# EAGLE board TemperatureReader (EAGLE 7.3.0)
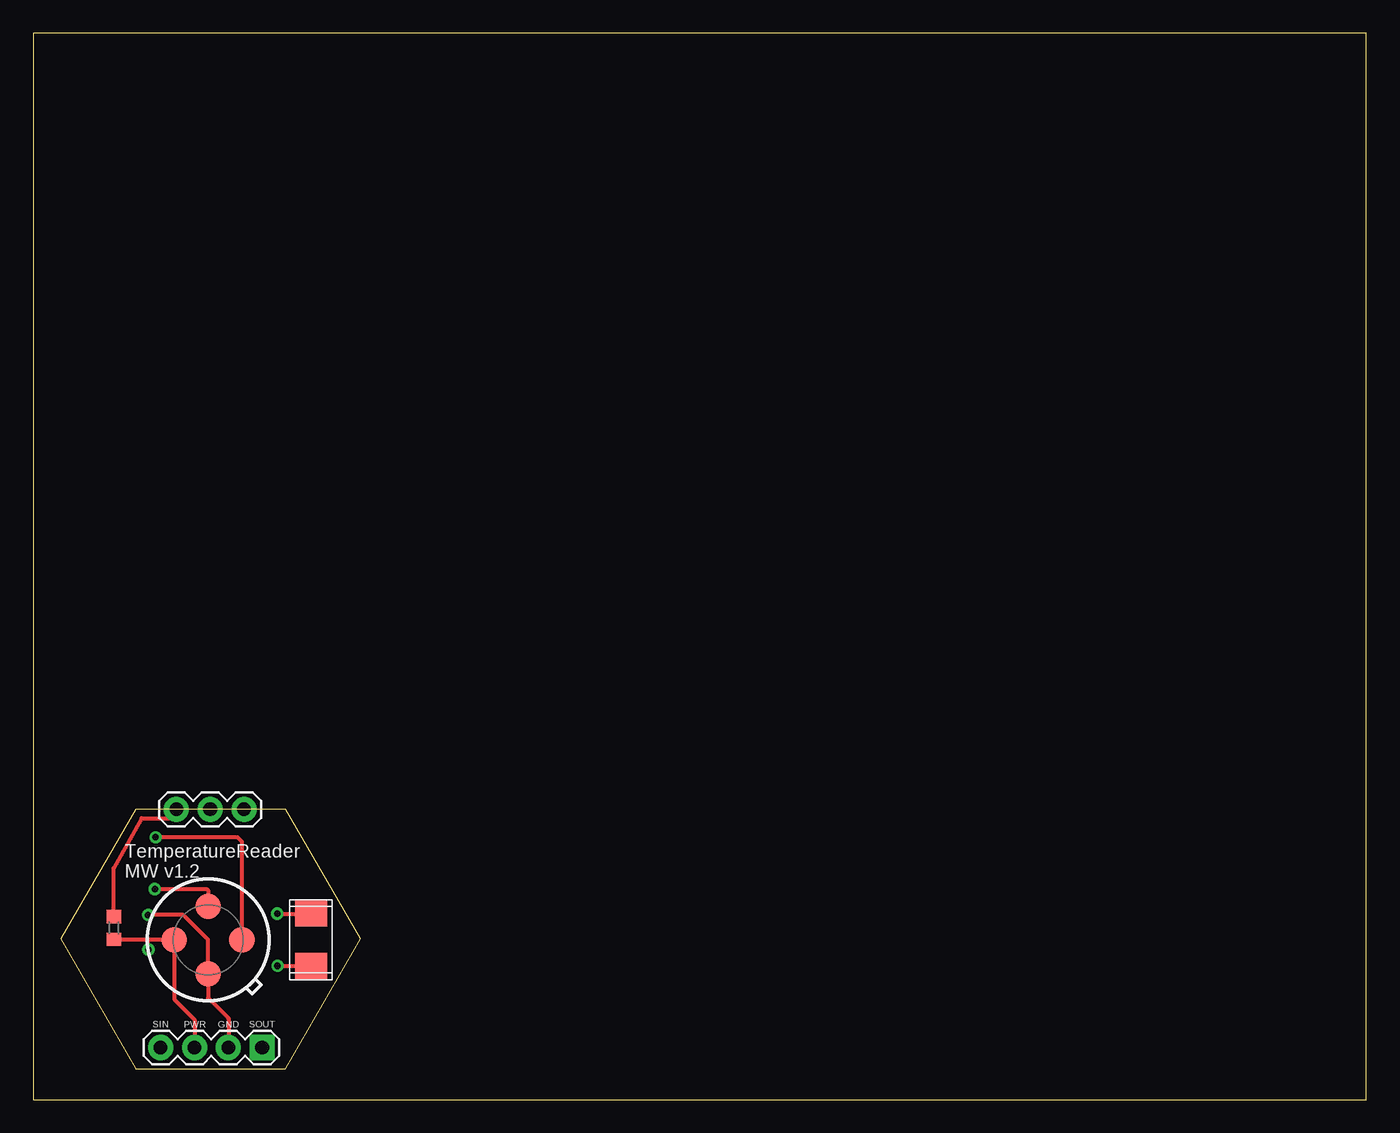
[diagram p0: board, top side]
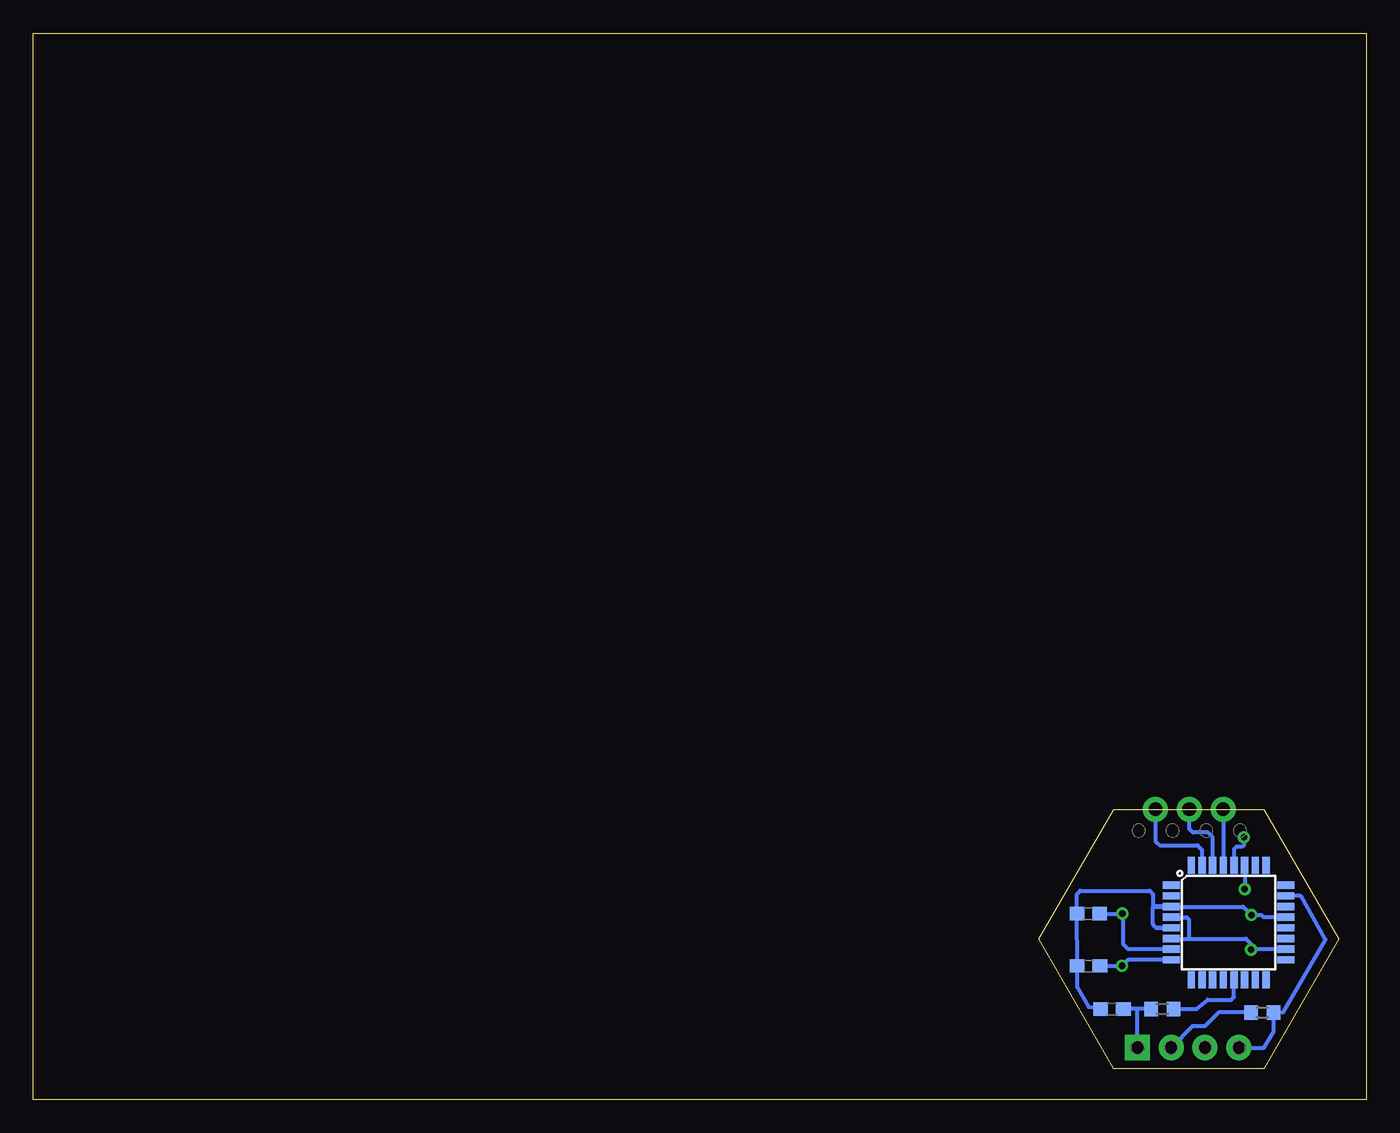
[diagram p1: board, bottom side, seen from below]

Size 100 x 80 mm. Coordinates in mm from the lower left corner, seen from the top.
Outline: 0,0 100,0 100,80 0,80 0,0
Outline: 7.69,2.3 18.94,2.3 24.56,12.04 18.94,21.78 7.69,21.78 2.06,12.04 7.69,2.3
Copper layers (1*16): Top 0.035mm / dielectric 1.5mm / Bottom 0.035mm
Design rules "default *": minimum track width 10mil, minimum drill 24mil, track to track 8mil, track to pad 8mil, pad to pad 8mil, via to via 8mil, smd to smd 8mil, copper to edge 0mil, drill to drill 8mil, minimum pad ring 10mil, minimum via ring 8mil, stop-mask expansion 4mil, vias tented up to drill 0mil, thermal gap 10mil

## Footprints (pad centres in the part's own frame; a part is rotated, then mirrored left to right if it is on the bottom)
C0603 = smd 1.1 x 1: 1 -0.85,0; 2 0.85,0
1X04 = drill 1.016 pad 1.88 square: 1 0,0 | drill 1.016 pad 1.88: 2 2.54,0; 3 5.08,0; 4 7.62,0
1X03 = drill 1.016 pad 1.88: 1 0,0; 2 2.54,0; 3 5.08,0
R0603 = smd 1 x 1.1: 1 -0.85,0; 2 0.85,0
TO-39 = smd 1.905 x 1.905: PWM 0,2.54; SCL 2.54,0; VDD -2.54,0; VSS 0,-2.54
TQFP32-08 = smd 1.27 x 0.559: 1 -4.293,2.8; 2 -4.293,2; 3 -4.293,1.2; 4 -4.293,0.4; 5 -4.293,-0.4; 6 -4.293,-1.2; 7 -4.293,-2; 8 -4.293,-2.8; 17 4.293,-2.8; 18 4.293,-2; 19 4.293,-1.2; 20 4.293,-0.4; 21 4.293,0.4; 22 4.293,1.2; 23 4.293,2; 24 4.293,2.8 | smd 0.559 x 1.27: 9 -2.8,-4.293; 10 -2,-4.293; 11 -1.2,-4.293; 12 -0.4,-4.293; 13 0.4,-4.293; 14 1.2,-4.293; 15 2,-4.293; 16 2.8,-4.293; 25 2.8,4.293; 26 2,4.293; 27 1.2,4.293; 28 0.4,4.293; 29 -0.4,4.293; 30 -1.2,4.293; 31 -2,4.293; 32 -2.8,4.293
NX503 = smd 2 x 2.4: P$1 -2,0; P$2 2,0

## Placement (x,y rotation side)
C1  22pF  [C0603]  20.85,13.95 180 bottom
C2  22pF  [C0603]  20.83,10.03 180 bottom
C3  0.22uF  [C0603]  19.07,6.79 180 bottom
JP1  [1X04]  17.17,3.9 180 top
JP2  [1X03]  10.73,21.78 0 top
R1  1M  [R0603]  7.79,6.53 0 bottom
R2  10K  [R0603]  6.04,12.87 270 top
R4  4.7K  [R0603]  15.29,6.8 0 bottom
U1  MLX90614  [TO-39]  13.11,11.97 0 top
U2  ATMEGA328P_TQFP  [TQFP32-08]  10.32,13.28 0 bottom
U$2  NX503  [NX503]  20.83,11.99 270 top

## Library data of the parts
C1-C3 R1 R4 = adafruit
JP1 JP2 = SparkFun-Connectors
R2 = resistor
U1 U$2 = MakerWear
U2 = SparkFun-DigitalIC; PROD_ID: IC-09069

## Nets
1X3SIN: JP1.4 R1.2 U2.23
1X3SOUT: C3.1 JP1.1 R4.1
GND: C1.2 C2.2 C3.2 JP1.2 R1.1 U1.VSS U2.3 U2.5 U2.21
N$1: C1.1 U2.7 U$2.P$1
N$3: C2.1 U2.8 U$2.P$2
OUT: R4.2 U2.13
RESET: JP2.1 R2.1 U2.29
RX: JP2.2 U2.30
SCL: U1.SCL U2.28
SDA: U1.PWM U2.27
TX: JP2.3 U2.31
VCC: JP1.3 R2.2 U1.VDD U2.4 U2.6 U2.18

## Tracks (layer width: path | path; a pad name or v marks a point on that pad's centre or on a via)
1X3SIN
  Bottom 0.305: U2.23 4.92,15.28 3.06,12 6.27,6.52 R1.2 6.94,5.12 7.68,3.89 7.69,3.9 JP1.4
1X3SOUT
  Bottom 0.305: R4.1 17.23,6.8 | 17.23,6.8 C3.1 | JP1.1 17.17,6.74 17.23,6.8
GND  (via drill 0.5)
  Top 0.305: JP1.2 14.64,6.09 13.11,7.62 U1.VSS 13.11,11.99 11.25,13.85 v8.61,13.85
  Bottom 0.305: 15.99,14.54 15.99,15.41 16.24,15.66 21.45,15.66 21.7,15.41 C1.2 C2.2 21.67,8.43 20.82,6.93 C3.2 | 15.99,14.54 15.99,14.42 | 15.99,13.13 15.99,13.11 15.76,12.88 U2.5 15.74,12.88 15.99,13.13 | U2.3 15.93,14.48 15.99,14.54 | R1.1 11.06,6.53 12.09,5.5 13.03,5.5 JP1.2 | U2.21 6.05,13.7 7.71,13.7 7.86,13.85 v8.61,13.85 9.23,14.47 15.94,14.47 15.99,14.42 | 15.99,13.13 15.99,14.42
N$1  (via drill 0.5)
  Top 0.305: v18.3,13.95 20.79,13.95 U$2.P$1
  Bottom 0.305: U2.7 17.85,11.28 18.22,11.65 18.22,13.87 v18.3,13.95 C1.1
N$3  (via drill 0.5)
  Top 0.305: v18.32,10.03 20.79,10.03 U$2.P$2
  Bottom 0.305: U2.8 17.87,10.48 v18.32,10.03 C2.1
OUT
  Bottom 0.305: R4.2 12.71,6.8 11.89,7.49 10.13,7.49 9.93,7.69 9.93,8.98 U2.13
RESET
  Top 0.305: R2.1 6.02,17.36 8.13,21.1 10.66,21.1 10.73,21.03 JP2.1
  Bottom 0.305: JP2.1 10.73,17.58 U2.29
RX
  Bottom 0.305: U2.30 11.52,19.67 11.88,20.03 12.99,20.03 13.28,20.32 JP2.2
SCL  (via drill 0.5)
  Top 0.305: U1.SCL 15.65,19.35 15.32,19.68 v9.17,19.68
  Bottom 0.305: v9.17,19.68 9.17,19.1 9.3,18.97 9.73,18.97 9.92,18.78 U2.28
SDA  (via drill 0.5)
  Top 0.305: v9.12,15.79 12.99,15.79 13.1,15.68 U1.PWM
  Bottom 0.305: U2.27 v9.12,15.79
TX
  Bottom 0.305: JP2.3 15.81,19.38 15.5,19.07 12.66,19.07 12.32,18.73 U2.31
VCC  (via drill 0.5)
  Top 0.305: JP1.3 12.1,5.99 10.57,7.52 U1.VDD 10.52,12.02 8.63,12.02 | R2.2 8.63,12.02 | v8.64,11.25 8.63,12.02
  Bottom 0.305: U2.6 14.59,12.08 14.57,12.06 13.31,12.06 | U2.18 8.61,11.28 v8.64,11.25 8.63,11.66 9.03,12.06 13.31,12.06 | U2.4 13.46,13.68 13.31,13.53 13.31,12.06

## Text on the board
tPlace: TemperatureReader / MW v1.2 | SIN | PWR | GND | SOUT